# Altium PCB PCB2.PcbDoc
Units mil, origin at the board's own origin, x right, y up, seen from the top; angles counter-clockwise.
Board outline 9040 x 5705 mil, 2 copper layers (Top Layer, Bottom Layer); 65 components, 58 nets, 193 pads, 44 vias.
Unrouted connection lines stored in the file: 10.
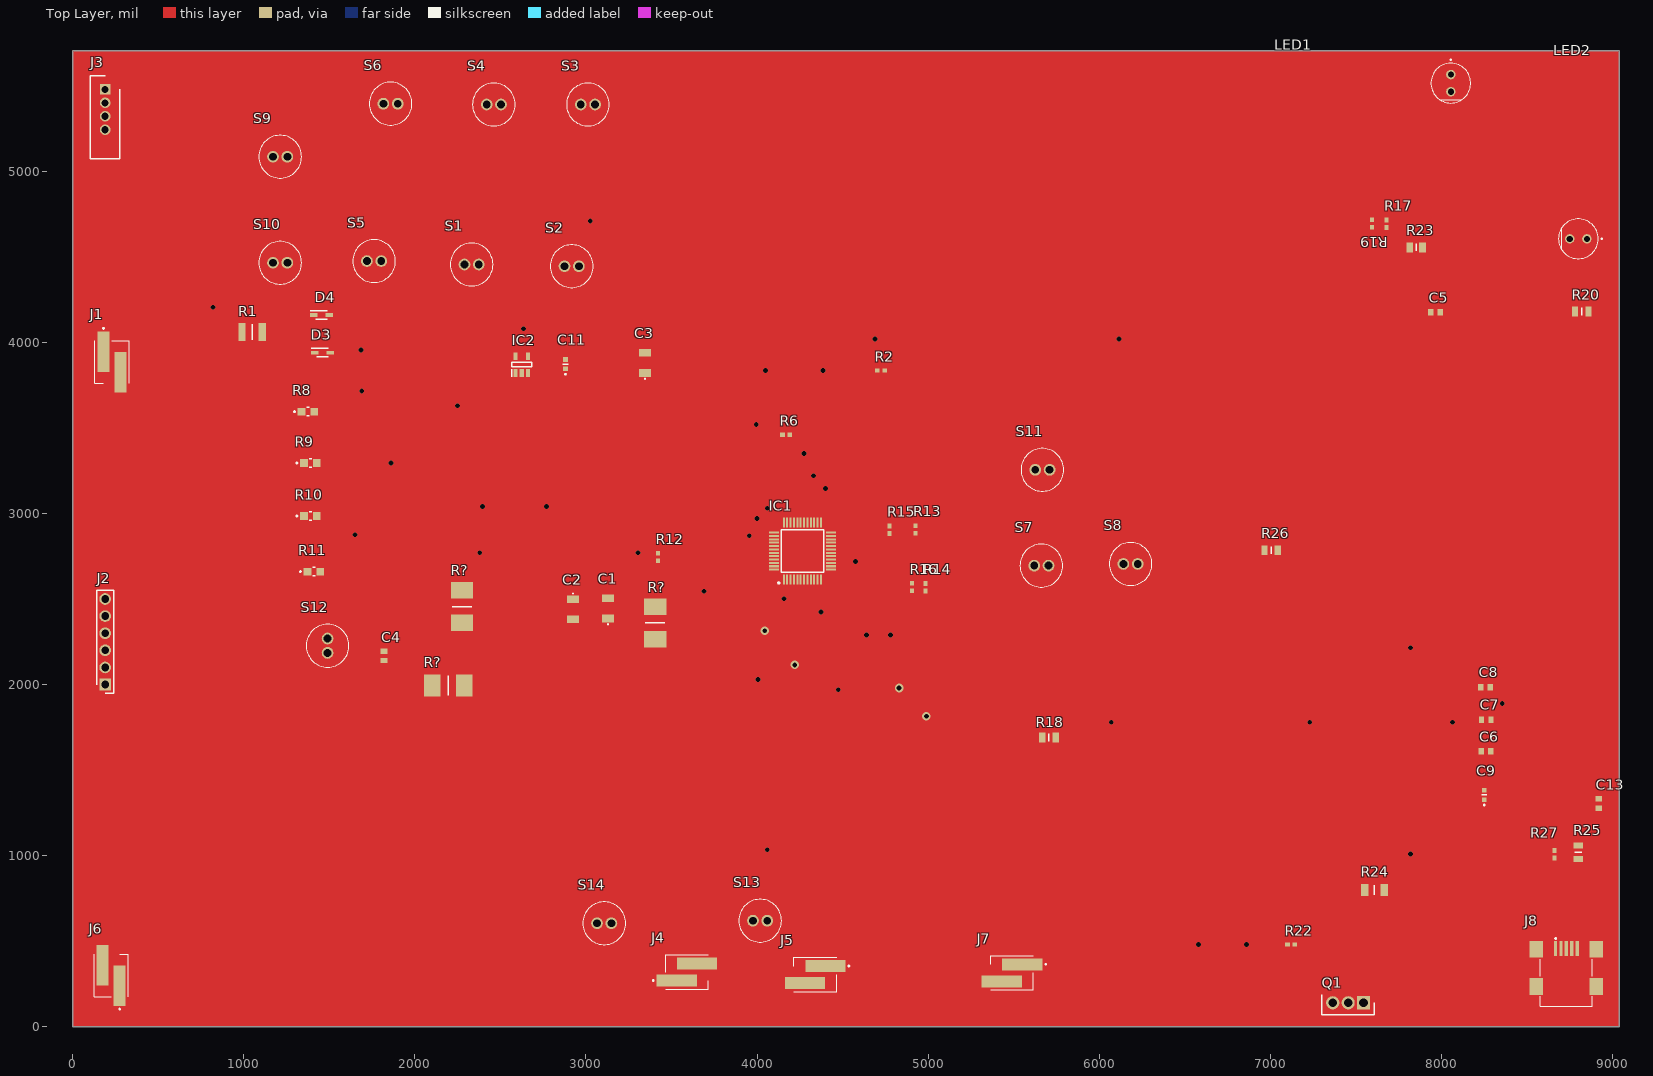
[diagram p0: Top Layer view]
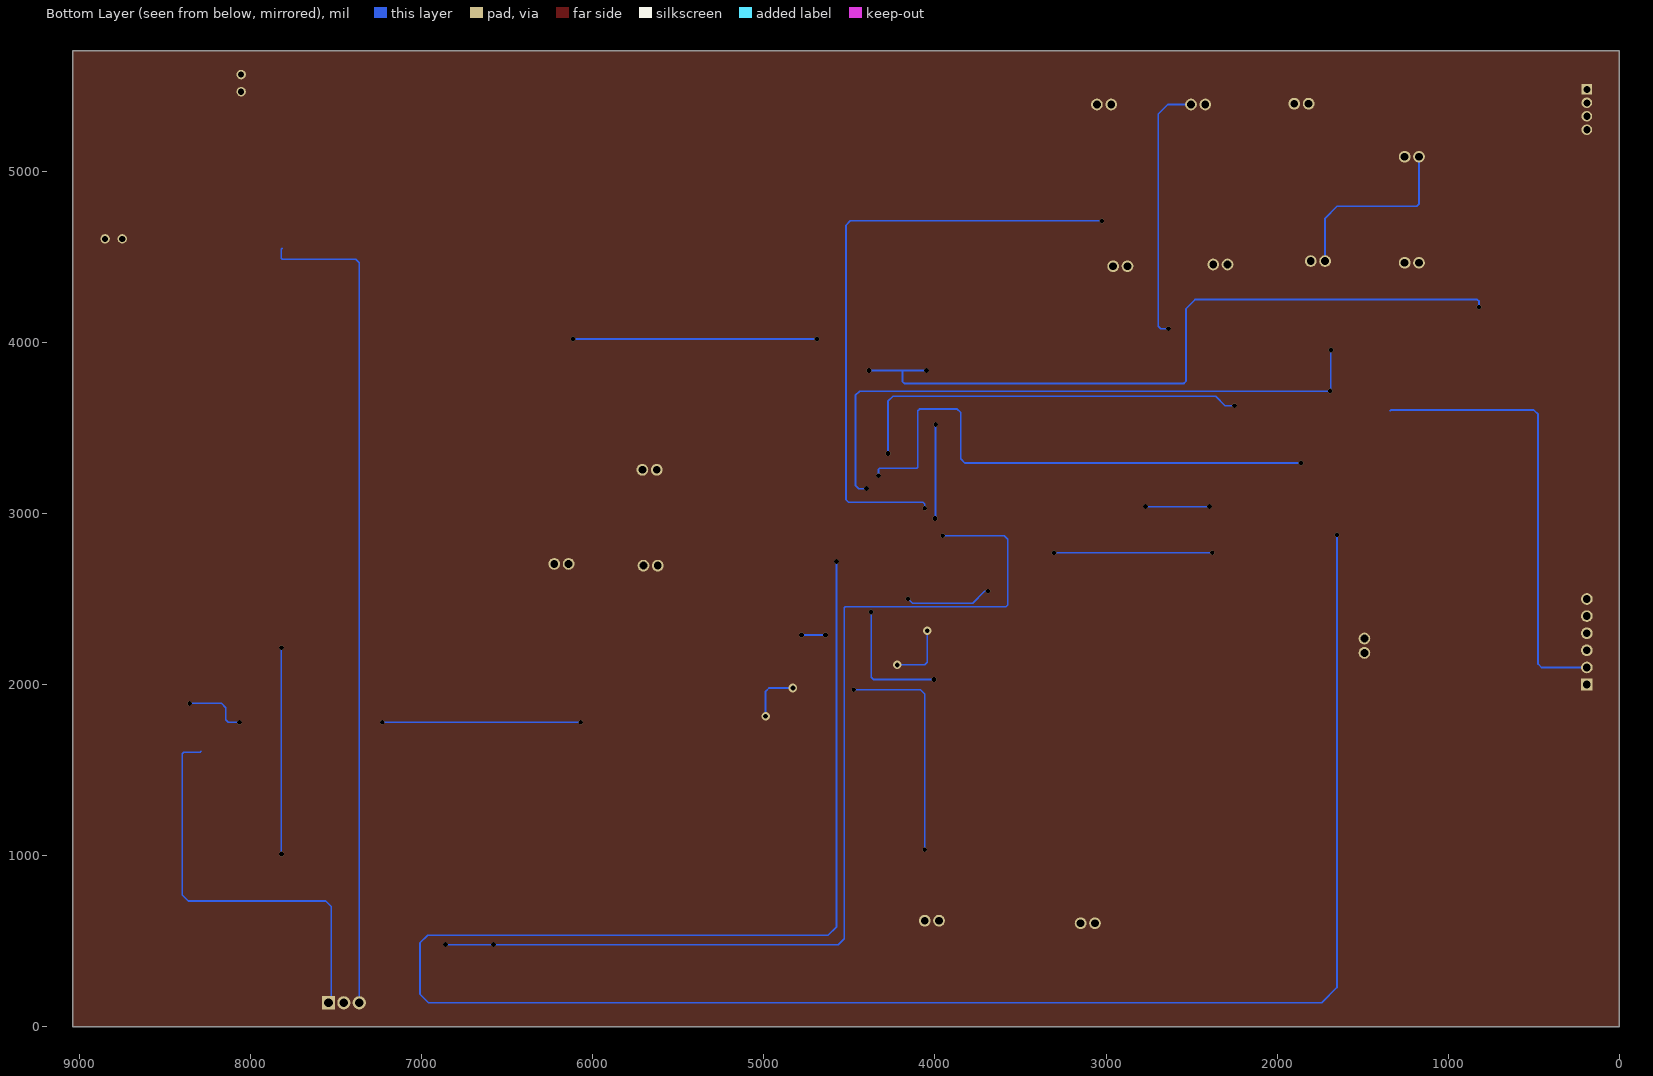
[diagram p1: Bottom Layer view, seen from below]
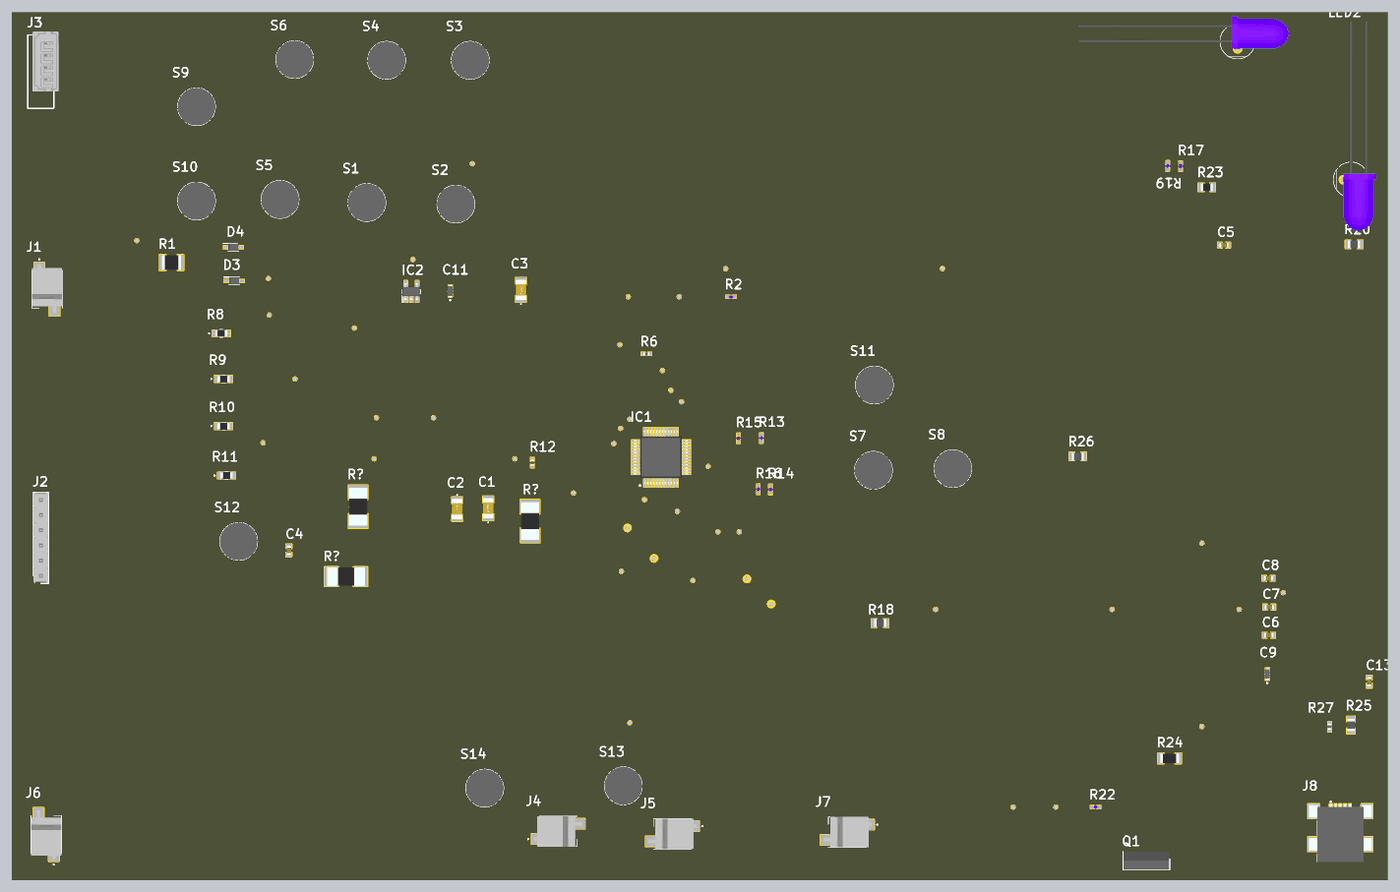
[diagram p2: 3D render of the assembled board from above, using the file's embedded part models]

## Layer stack, top to bottom
Top Solder: solder mask 0.4, Solder Resist, Dk 3.5
Top Layer: signal copper 1.4
Dielectric 1: dielectric 12.6, FR-4, Dk 4.8
Bottom Layer: signal copper 1.4
Bottom Solder: solder mask 0.4, Solder Resist, Dk 3.5

## Board outline
0,0 0,5705 9040,5705 9040,0

## Design rules (kind name [scope] priority, off if disabled: settings)
Clearance [All] p1: gap=10 ignorepadtopadclearanceinfootprint=FALSE
PolygonConnect [All] p1: connectstyle=Relief reliefconductorwidth=10 reliefentries=4 polygonreliefangle="90 Angle" airgapwidth=10
RoutingVias [All] p1: holewidth=28 width=50 viastyle="Through Hole" minholewidth=28 minwidth=50 maxholewidth=28 maxwidth=50
SolderMaskExpansion [All] p1: expansion=4 istentingtop=FALSE
Width [All] p1: maxlimit=10 minlimit=10 preferedwidth=10
30 further rules are at their usual default settings.

## Components (designator, comment, footprint, x,y, rotation, side; value= is the part's Value field where it differs from the comment)
C1 "C1206C200KCGACTU" C1206 3130,2445 r90 top
C2 "C1206C200KCGACTU" C1206 2925,2440 r270 top
C3 "C1206C200KCGACTU" C1206 3345,3880 r90 top
C4 "KAM15AR71H104KM" CAPC1608X90N 1820,2167.56 r90 top
C5 "06035C104K4T4A" CAPC1608X90N 7965,4175 r0 top
C6 "06035C104K4T4A" CAPC1608X90N 8260,1610 r0 top
C7 "06035C104K4T4A" CAPC1608X90N 8262.44,1795 r0 top
C8 "06035C104K4T4A" CAPC1608X90N 8257.56,1985 r0 top
C9 "MAJCT168BB7105KTEA01" MAJx16 8250,1355 r90 top
C11 "MAJCT168BB7105KTEA01" MAJx16 2880,3872.44 r90 top
C13 "06035C104K4T4A" CAPC1608X90N 8920,1305 r90 top
D3 "BAT60JFILM" SOD2513X117N 1460.12,3940 r0 top
D4 "BAT60JFILM" SOD2513X117N 1455,4160 r0 top
IC1 "STM32F103C8T6TR" QFP50P900X900X160-48N 4265,2780 r90 top
IC2 "LD3985M33R" SOT95P280X145-5N 2625,3870 r90 top
J1 "3-647166-2" 36471662 230,3885 r180 top
J2 "22-28-4062" HDRV6W66P0X254_1X6_1524X249X838P 190,2000 r90 top
J3 "53014-0410" SHDR4W60P0X200_1X4_1200X435X1000P 190,5478.74 r90 top
J4 "3-647166-2" 36471662 3590.16,320 r270 top
J5 "3-647166-2" 36471662 4340,305 r90 top
J6 "3-647166-2" 36471662 225,300 r0 top
J7 "3-647166-2" 36471662 5490.16,315 r90 top
J8 "5075BMR-05-SM" 5075BMR05SM 8730,320 r0 top
LED1 "SSL-LX5093VC" SSLLX5093VC 8055,5565 r270 top
LED2 "SSL-LX5093VC" SSLLX5093VC 8850,4605 r180 top
Q1 "BD139" TO229P300X760X1364-3P 7545.16,140 r180 top
R1 "CRCW12102K70FKEAHP" RESC3225X70N 1049.06,4060 r180 top
R2 "MCS04020D4701BE000" RESC1005X37N 4725,3835 r0 top
R6 "SFR01MZPF1003" RESC1005X40N 4170,3460 r0 top
R8 "ERA-6AHD220V" ERA6AEB1020V 1375,3595 r0 top
R9 "ERA-6AHD220V" ERA6AEB1020V 1390,3295 r0 top
R10 "ERA-6AHD220V" ERA6AEB1020V 1390,2985 r0 top
R11 "ERA-6AHD220V" ERA6AEB1020V 1410,2660 r0 top
R12 "SFR01MZPF1003" RESC1005X40N 3420,2745 r270 top
R13 "MCS04020C1000FE000" RESC1005X37N 4925,2906.65 r90 top
R14 "MCS04020D4701BE000" RESC1005X37N 4985,2568.35 r90 top
R15 "MCS04020C1000FE000" RESC1005X37N 4775,2905 r90 top
R16 "MCS04020D4701BE000" RESC1005X37N 4905,2570 r90 top
R17 "MCS04020C1000FE000" RESC1005X37N 7680,4693.35 r270 top
R18 "WSL080500000ZEA9" RESC2013X84N 5705.63,1690 r0 top
R19 "MCS04020C1000FE000" RESC1005X37N 7595,4695 r270 top
R20 "WSL080500000ZEA9" RESC2013X84N 8820,4180 r180 top
R22 "MCS04020C1000FE000" RESC1005X37N 7121.65,480 r180 top
R23 "TNPW080536K0BEEA" RESC2012X55N 7852.4,4555 r0 top
R24 "CRCW12061K50FKEAHP" RESC3116X65N 7607.91,800 r180 top
R25 "WSL080500000ZEA9" RESC2013X84N 8800,1020 r90 top
R26 "WSL080500000ZEA9" RESC2013X84N 7005,2785 r180 top
R27 "SFR01MZPF1003" RESC1005X40N 8660,1008.35 r270 top
R? "CRM2512QJW-103ELF" RESC6331X80N 3405,2360.51 r90 top
R? "CRM2512QJW-103ELF" RESC6331X80N 2275,2455.51 r90 top
R? "CRM2512QJW-103ELF" RESC6331X80N 2195,1995 r0 top
S1 "8631CQD2" 8631CQD2 2290,4455 r0 top
S2 "8631CQD2" 8631CQD2 2875,4445 r0 top
S3 "8631CQD2" 8631CQD2 2970,5390 r0 top
S4 "8631CQD2" 8631CQD2 2420,5390 r0 top
S5 "8631CQD2" 8631CQD2 1720,4475 r0 top
S6 "8631CQD2" 8631CQD2 1816.14,5395 r0 top
S7 "8631CQD2" 8631CQD2 5620,2695 r0 top
S8 "8631CQD2" 8631CQD2 6141.14,2705 r0 top
S9 "8631CQD2" 8631CQD2 1171.14,5085 r0 top
S10 "8631CQD2" 8631CQD2 1255,4465 r180 top
S11 "8631CQD2" 8631CQD2 5626.14,3255 r0 top
S12 "8631CQD2" 8631CQD2 1490,2185 r90 top
S13 "8631CQD2" 8631CQD2 3976.14,620 r0 top
S14 "8631CQD2" 8631CQD2 3065,605 r0 top

## Footprints (in the part's own frame and the unit in brackets; to place one, negate y for a bottom-side part, rotate by r counter-clockwise, add the part's x,y. Pads: shape width x height; smd on the part's side, far side on the other; paste and mask are expansions set on the pad)
5075BMR05SM [mm]
  rect 0.5x2.25 smd: 1(-1.6,3.495) 2(-0.8,3.495) 3(0,3.495) 4(0.8,3.495) 5(1.6,3.495)
  rect 2x2.5 smd: 6(-4.45,3.37) 7(-4.45,-2.13) 8(4.45,-2.13) 9(4.45,3.37)
  silkscreen extent -3.85,-5.07 3.85,5.07, body extent -5.25,-5.07 5.25,4.57, height 4.1
8631CQD2 [mm]
  round 1.74 hole 1.16: 1(0,0) 2(2.13,0)
  silkscreen extent -2.11,-3.17 4.24,3.17, body extent -2.11,-3.17 4.24,3.17, height 14.03
36471662 [mm]
  rect 1.78x5.97 smd: 1(1.27,-1.52) 2(-1.27,1.52)
  silkscreen extent -2.54,-5.1 2.54,3.18, body extent -2.54,-4.08 2.54,4, height 10.55
C1206 [mm]
  rect 1.15x1.8 smd: 1(-1.5,0) 2(1.5,0)
  silkscreen extent -2.4,-0.05 -2.3,0.05, body extent -1.7,-0.9 1.7,0.9, height 1.75
CAPC1608X90N [mm]
  rect 0.78x0.99 smd: 1(-0.7,0) 2(0.7,0)
  body extent -0.8,-0.41 0.8,0.41, height 0.9
ERA6AEB1020V [mm]
  rect 1.15x1.15 smd: 1(-0.95,0) 2(0.95,0)
  silkscreen extent -2.1,-0.63 0.2,0.63, body extent -1,-0.63 1,0.63, height 0.5
HDRV6W66P0X254_1X6_1524X249X838P [mm]
  rect 1.725x1.725 hole 1.15: 1(0,0)
  round 1.725 hole 1.15: 2(2.54,0) 3(5.08,0) 4(7.62,0) 5(10.16,0) 6(12.7,0)
  silkscreen extent -1.27,-1.24 13.97,1.24, body extent -1.27,-1.24 13.97,1.24, height 9.65
MAJx16 [mm]
  rect 0.7x0.7 smd: 1(-0.7,0) 2(0.7,0)
  silkscreen extent -1.6,-0.4 0,0.4, body extent -0.98,-0.4 0.98,0.4, height 0.9
QFP50P900X900X160-48N [mm]
  rect 1.475x0.3 smd: 1(-4.238,2.75) 2(-4.238,2.25) 3(-4.238,1.75) 4(-4.238,1.25) 5(-4.238,0.75) 6(-4.238,0.25) 7(-4.238,-0.25) 8(-4.238,-0.75) 9(-4.238,-1.25) 10(-4.238,-1.75) 11(-4.238,-2.25) 12(-4.238,-2.75) 25(4.238,-2.75) 26(4.238,-2.25) 27(4.238,-1.75) 28(4.238,-1.25) 29(4.238,-0.75) 30(4.238,-0.25) 31(4.238,0.25) 32(4.238,0.75) 33(4.238,1.25) 34(4.238,1.75) 35(4.238,2.25) 36(4.238,2.75)
  rect 0.3x1.475 smd: 13(-2.75,-4.238) 14(-2.25,-4.238) 15(-1.75,-4.238) 16(-1.25,-4.238) 17(-0.75,-4.238) 18(-0.25,-4.238) 19(0.25,-4.238) 20(0.75,-4.238) 21(1.25,-4.238) 22(1.75,-4.238) 23(2.25,-4.238) 24(2.75,-4.238) 37(2.75,4.238) 38(2.25,4.238) 39(1.75,4.238) 40(1.25,4.238) 41(0.75,4.238) 42(0.25,4.238) 43(-0.25,4.238) 44(-0.75,4.238) 45(-1.25,4.238) 46(-1.75,4.238) 47(-2.25,4.238) 48(-2.75,4.238)
  silkscreen extent -4.85,-3.15 3.15,3.62, body extent -4.5,-4.5 4.5,4.5, height 1.6
RESC1005X37N [mm]
  rect 0.7x0.6 smd: 1(-0.55,0) 2(0.55,0)
  body extent -0.5,-0.25 0.5,0.25, height 0.32
RESC1005X40N [mm]
  rect 0.7x0.6 smd: 1(-0.55,0) 2(0.55,0)
  body extent -0.5,-0.25 0.5,0.25, height 0.4
RESC2012X55N [mm]
  rect 1x1.45 smd: 1(-0.95,0) 2(0.95,0)
  silkscreen extent 0,-0.53 0,0.53, body extent -1,-0.63 1,0.63, height 0.55
RESC2013X84N [mm]
  rect 0.95x1.45 smd: 1(-1,0) 2(1,0)
  silkscreen extent 0,-0.54 0,0.54, body extent -1.01,-0.64 1.01,0.64, height 0.36
RESC3116X65N [mm]
  rect 1.1x1.8 smd: 1(-1.45,0) 2(1.45,0)
  silkscreen extent 0,-0.7 0,0.7, body extent -1.55,-0.8 1.55,0.8, height 0.65
RESC3225X70N [mm]
  rect 1.1x2.7 smd: 1(-1.5,0) 2(1.5,0)
  silkscreen extent 0,-1.15 0,1.15, body extent -1.6,-1.25 1.6,1.25, height 0.7
RESC6331X80N [mm]
  rect 2.45x3.3 smd: 1(-2.4,0) 2(2.4,0)
  silkscreen extent 0,-1.45 0,1.45, body extent -3.15,-1.55 3.15,1.55, height 0.8
SHDR4W60P0X200_1X4_1200X435X1000P [mm]
  rect 1.575x1.575 hole 1.05: 1(0,0)
  round 1.575 hole 1.05: 2(-2,0) 3(-4,0) 4(-6,0)
  silkscreen extent -10.3,-2.17 2,2.17, body extent -7.45,-2.96 2.55,1.39, height 5.85
SOD2513X117N [mm]
  rect 1.085x0.55 smd: 1(-1.14,0) 2(1.14,0)
  silkscreen extent -1.68,-0.64 0.83,0.64, body extent -1.25,-0.64 1.25,0.64, height 1.17
SOT95P280X145-5N [mm]
  rect 1.15x0.6 smd: 1(-1.25,0.95) 2(-1.25,0) 3(-1.25,-0.95) 4(1.25,-0.95) 5(1.25,0.95)
  silkscreen extent -1.83,-1.48 0.33,1.5, body extent -1.4,-1.48 1.4,1.48, height 1.45
SSLLX5093VC [mm]
  round 1.4 hole 0.91: 1(0,0) 2(2.54,0)
  silkscreen extent -2.3,-2.95 4.22,2.95, body extent -2.93,-26.5 2.51,8.6, height 2.95
TO229P300X760X1364-3P [mm]
  rect 1.95x1.95 hole 1.3: 1(0,0)
  round 1.95 hole 1.3: 2(2.29,0) 3(4.58,0)
  silkscreen extent -1.61,-1.19 6.19,1.81, body extent -1.51,-1.19 6.09,1.81, height 12.76

## Part data
C1 C2 C3: "Capacitor", Manufacturer_Name=KEMET, Datasheet Link=https://content.kemet.com/datasheets/KEM_C1009_C0G_HV_SMD.pdf, Manufacturer_Part_Number=C1206C200KCGACTU
C4: "Capacitor", Manufacturer_Name="Kyocera AVX", Mouser Part Number=581-KAM15AR71H104KM, Arrow Part Number=KAM15AR71H104KM, Arrow Price/Stock=https://www.arrow.com/en/products/kam15ar71h104km/avx?region=nac, Datasheet Link=https://datasheets.kyocera-avx.com/AutoMLCCKAM.pdf, Height=0.9mm, Manufacturer_Part_Number=KAM15AR71H104KM, Mouser Price/Stock=https://www.mouser.co.uk/ProductDetail/KYOCERA-AVX/KAM15AR71H104KM?qs=Jm2GQyTW%2FbgzS5FHJWrFzQ%3D%3D
C5 C6 C7 C8 C13: "Capacitor", Manufacturer_Name="Kyocera AVX", Mouser Part Number=581-06035C104K4T4A, Arrow Part Number=06035C104K4T4A, Arrow Price/Stock=https://www.arrow.com/en/products/06035c104k4t4a/avx, Datasheet Link=https://componentsearchengine.com/Datasheets/1/06031A100FAT2A.pdf, Height=0.9mm, Manufacturer_Part_Number=06035C104K4T4A, Mouser Price/Stock=https://www.mouser.co.uk/ProductDetail/KYOCERA-AVX/06035C104K4T4A?qs=NBj5Hwer2CEXBYKT%252BbuSBA%3D%3D
C9 C11: "Capacitor", Manufacturer_Name="TAIYO YUDEN", Datasheet Link=https://ds.yuden.co.jp/TYCOMPAS/or/detail?pn=MAJCT168BB7105KTEA01, Height=0.8mm, Manufacturer_Part_Number=MAJCT168BB7105KTEA01
D3 D4: "Schottky Diode", Manufacturer_Name=STMicroelectronics, Mouser Part Number=511-BAT60JFILM, Arrow Part Number=BAT60JFILM, Arrow Price/Stock=https://www.arrow.com/en/products/bat60jfilm/stmicroelectronics?region=nac, Datasheet Link=https://www.mouser.jp/datasheet/2/389/cd00001944-1795661.pdf, Height=1.17mm, Manufacturer_Part_Number=BAT60JFILM, Mouser Price/Stock=https://www.mouser.co.uk/ProductDetail/STMicroelectronics/BAT60JFILM?qs=GnFZssByvVVVnMaukcyLZg%3D%3D
IC1: "Integrated Circuit", Manufacturer_Name=STMicroelectronics, Mouser Part Number=511-STM32F103C8T6TR, Arrow Part Number=STM32F103C8T6TR, Arrow Price/Stock=https://www.arrow.com/en/products/stm32f103c8t6tr/stmicroelectronics?region=nac, Datasheet Link=http://media.digikey.com/pdf/Data%20Sheets/ST%20Microelectronics%20PDFS/STM32F103x8,B.pdf, Height=1.6mm, Manufacturer_Part_Number=STM32F103C8T6TR, Mouser Price/Stock=https://www.mouser.co.uk/ProductDetail/STMicroelectronics/STM32F103C8T6TR?qs=5HwTSiuA5HDxFj62n06yag%3D%3D
IC2: "Integrated Circuit", Manufacturer_Name=STMicroelectronics, Mouser Part Number=511-LD3985M33R, Arrow Part Number=LD3985M33R, Arrow Price/Stock=https://www.arrow.com/en/products/ld3985m33r/stmicroelectronics?region=europe, Datasheet Link=http://www.st.com/st-web-ui/static/active/en/resource/technical/document/datasheet/CD00003395.pdf, Height=1.45mm, Manufacturer_Part_Number=LD3985M33R, Mouser Price/Stock=https://www.mouser.co.uk/ProductDetail/STMicroelectronics/LD3985M33R?qs=22WmWNTp1rrPOccVv4HZ7A%3D%3D
J1 J4 J5 J6 J7: "Connector", Manufacturer_Name="TE Connectivity", Mouser Part Number=571-3-647166-2, Arrow Part Number=3-647166-2, Arrow Price/Stock=https://www.arrow.com/en/products/3-647166-2/te-connectivity?region=nac, Datasheet Link=https://www.te.com/commerce/DocumentDelivery/DDEController?Action=showdoc&DocId=Customer+Drawing%7F647166%7FR1%7Fpdf%7FEnglish%7FENG_CD_647166_R1.pdf%7F3-647166-2, Height=10.66mm, Manufacturer_Part_Number=3-647166-2, Mouser Price/Stock=https://www.mouser.co.uk/ProductDetail/TE-Connectivity/3-647166-2?qs=xsTFCgGnzbJU1qz6Np9kzA%3D%3D
J2: "Connector", Manufacturer_Name=Molex, Mouser Part Number=538-22-28-4062, Datasheet Link=https://datasheet.datasheetarchive.com/originals/distributors/SFDatasheet-1/sf-00031037.pdf, Height=8.38mm, Manufacturer_Part_Number=22-28-4062, Mouser Price/Stock=https://www.mouser.com/Search/Refine.aspx?Keyword=538-22-28-4062
J3: "Connector", Manufacturer_Name=Molex, Mouser Part Number=538-53014-0410, Datasheet Link=https://www.molex.com/pdm_docs/sd/530140410_sd.pdf, Height=10mm, Manufacturer_Part_Number=53014-0410, Mouser Price/Stock=https://www.mouser.co.uk/ProductDetail/Molex/53014-0410?qs=TLs3Kb%252BkMqKk8s1WRHwRGw%3D%3D
J8: "Connector", Manufacturer_Name=NELTRON, Datasheet Link=http://www.ibselectronics.com/ibsstore/datasheet/5075BMR-05-SM-CR.pdf, Height=4mm, Manufacturer_Part_Number=5075BMR-05-SM
LED1 LED2: "LED", Manufacturer_Name=Lumex, Mouser Part Number=696-SSL-LX5093VC, Arrow Part Number=SSL-LX5093VC, Arrow Price/Stock=https://www.arrow.com/en/products/ssl-lx5093vc/lumex?region=nac, Datasheet Link=https://componentsearchengine.com/Datasheets/2/SSL-LX5093VC.pdf, Height=9.6mm, Manufacturer_Part_Number=SSL-LX5093VC, Mouser Price/Stock=https://www.mouser.co.uk/ProductDetail/Lumex/SSL-LX5093VC?qs=94qWIstW55UoxYgVqNRcug%3D%3D
Q1: "Transistor BJT NPN", Manufacturer_Name=onsemi, Mouser Part Number=863-BD139, Datasheet Link=http://www.onsemi.com/pub/Collateral/BD135-D.PDF, Height=3mm, Manufacturer_Part_Number=BD139, Mouser Price/Stock=https://www.mouser.co.uk/ProductDetail/onsemi/BD139?qs=vNc2DXHODiI0%252BZZC8g2wVg%3D%3D
R1: "Resistor", Manufacturer_Name=Vishay, Mouser Part Number=71-CRCW12102K70FKEAH, Datasheet Link=http://componentsearchengine.com/Datasheets/1/CRCW12102K70FKEAHP.pdf, Height=0.7mm, Manufacturer_Part_Number=CRCW12102K70FKEAHP, Mouser Price/Stock=https://www.mouser.co.uk/ProductDetail/Vishay-Dale/CRCW12102K70FKEAHP?qs=OAzHGkhREL0m0%252BU1n6AaAg%3D%3D
R2 R14 R16: "Resistor", Manufacturer_Name=Vishay, Mouser Part Number=594-MCS04020D4701BE0, Datasheet Link=http://www.vishay.com/docs/28705/mcx0x0xpro.pdf, Height=0.37mm, Manufacturer_Part_Number=MCS04020D4701BE000, Mouser Price/Stock=https://www.mouser.co.uk/ProductDetail/Vishay-Beyschlag/MCS04020D4701BE000?qs=ft9OtscSA3%252BR0DpF5QqL2Q%3D%3D
R6 R12 R27: "Resistor", Manufacturer_Name="ROHM Semiconductor", Mouser Part Number=755-SFR01MZPF1003, Datasheet Link=https://fscdn.rohm.com/en/products/databook/datasheet/passive/resistor/chip_resistor/sfr-e.pdf, Height=0.4mm, Manufacturer_Part_Number=SFR01MZPF1003, Mouser Price/Stock=https://www.mouser.co.uk/ProductDetail/ROHM-Semiconductor/SFR01MZPF1003?qs=Mv7BduZupUj2RFL5gMaKTg%3D%3D
R8 R9 R10 R11: "Resistor", Manufacturer_Name=Panasonic, Mouser Part Number=667-ERA-6AHD220V, Datasheet Link=https://industrial.panasonic.com/cdbs/www-data/pdf/RDM0000/AOA0000C307.pdf, Height=0.6mm, Manufacturer_Part_Number=ERA-6AHD220V, Mouser Price/Stock=https://www.mouser.co.uk/ProductDetail/Panasonic/ERA-6AHD220V/?qs=MNPzkKEzRtQTWqg2JSKn2A%3D%3D
R13 R15 R17 R19 R22: "Resistor", Manufacturer_Name=Vishay, Mouser Part Number=594-MCS04020C1000FE0, Arrow Part Number=MCS04020C1000FE000, Arrow Price/Stock=https://www.arrow.com/en/products/mcs04020c1000fe000/vishay, Datasheet Link=http://www.vishay.com/docs/28705/mcx0x0xpro.pdf, Height=0.37mm, Manufacturer_Part_Number=MCS04020C1000FE000, Mouser Price/Stock=https://www.mouser.co.uk/ProductDetail/Vishay-Beyschlag/MCS04020C1000FE000?qs=7ZE6F4QMOBYkwvQlfbkT8w%3D%3D
R18 R20 R25 R26: "Resistor", Manufacturer_Name=Vishay, Mouser Part Number=71-WSL080500000ZEA9, Arrow Part Number=WSL080500000ZEA9, Arrow Price/Stock=https://www.arrow.com/en/products/wsl080500000zea9/vishay?region=nac, Datasheet Link=https://ad.componentsearchengine.com/Datasheets/2/WSL080500000ZEA9.pdf, Height=0.838mm, Manufacturer_Part_Number=WSL080500000ZEA9, Mouser Price/Stock=https://www.mouser.co.uk/ProductDetail/Vishay-Dale/WSL080500000ZEA9?qs=f1l5vAGoKgsImKS87N8TmQ%3D%3D
R23: "Resistor", Manufacturer_Name=Vishay, Datasheet Link=https://www.vishay.com/docs/31006/tnpw.pdf, Height=0.55mm, Manufacturer_Part_Number=TNPW080536K0BEEA
R24: "Resistor", Manufacturer_Name=Vishay, Mouser Part Number=71-CRCW12061K50FKEAH, Arrow Part Number=CRCW12061K50FKEAHP, Arrow Price/Stock=https://www.arrow.com/en/products/crcw12061k50fkeahp/vishay?region=nac, Datasheet Link=http://componentsearchengine.com/Datasheets/1/CRCW12061K50FKEAHP.pdf, Height=0.65mm, Manufacturer_Part_Number=CRCW12061K50FKEAHP, Mouser Price/Stock=https://www.mouser.co.uk/ProductDetail/Vishay-Dale/CRCW12061K50FKEAHP?qs=k2%2FDWSARqgEwHXAQbL4aEg%3D%3D
R? R? R?: "Resistor", Manufacturer_Name=Bourns, Mouser Part Number=652-CRM2512QJW-103E, Arrow Part Number=CRM2512QJW-103ELF, Arrow Price/Stock=https://www.arrow.com/en/products/crm2512qjw-103elf/bourns?region=nac, Datasheet Link=http://www.bourns.com/data/global/pdfs/CRM0805_1206_2010.pdf, Height=0.8mm, Manufacturer_Part_Number=CRM2512QJW-103ELF, Mouser Price/Stock=https://www.mouser.co.uk/ProductDetail/Bourns/CRM2512QJW-103ELF?qs=8Wlm6%252BaMh8Rzg3bRHdWGsA%3D%3D
S1 S2 S3 S4 S5 S6 S7 S8 S9 S10 S11 S12 S13 S14: "Switch (2-Pin Push)", Manufacturer_Name="C & K COMPONENTS", Mouser Part Number=611-8631-261, Datasheet Link=https://www.ckswitches.com/media/1396/8600.pdf, Height=13.93mm, Manufacturer_Part_Number=8631CQD2, Mouser Price/Stock=https://www.mouser.co.uk/ProductDetail/CK/8631CQD2?qs=ktcBc77oICXe9iPhfEwnkA%3D%3D

## Via types
v1: diameter 28, hole 28, Top Layer to Bottom Layer, 40 vias
v2: diameter 50, hole 28, Top Layer to Bottom Layer, 4 vias

## Nets (pads, with @x,y where several pads share a name; then routed paths per layer and width w, separated by ;. In a path a pad name is that pad's centre, name@x,y a point inside that pad or via, vN(x,y) a via of type N, cw(c..) or ccw(c..) an arc to the next point about the centre after c; other vN are vias at no path point)
+3V3: R14.1
+3V3_ST_LINK: C5.2 C6.2 C7.2 C8.2 IC1.1 IC1.9 IC1.24 IC1.36 IC1.48 IC2.5 J1.2 Q1.1 R12.2 R18.2 R20.2 S4.2 | length 19201.2
  Top Layer w10: J1.2 2330.16,3825.16 2332.54,3827.54 ; v1(2395,3040) 2350,3040 2332.54,3057.46 2332.54,3827.54 ; IC2.5@2580.79,3926.02 IC2.5 2587.6,4074.14 2593.46,4080 v1(2635,4080) ; 2585,3975 2355,3975 2332.54,3952.54 2332.54,3827.54 ; v1(2770,3040) 3170,3040 3205,3005 3205,2713.28 3248.28,2670 3420,2670 ; R12.2 3420,2670 ; IC1.48 4046.73,2671.73 4045,2670 3420,2670 ; IC1.48@4125,2670 4140,2670 4156.73,2686.73 IC1.36 ; v2(4220,2115) 4315,2115 ; IC1.9 4314.21,2555.79 4315,2555 4315,2115 ; R18.2 5920,1690 5940,1710 5940,1780 ; v1(6070,1780) 5940,1780 ; v1(7230,1780) v1(8065,1780) ; C5.2 7997.56,4180 8389.09,4180 ; C6.2 C7.2@8287.56,1792.56 ; v1(8355,1890) 8405,1890 8430,1865 8430,1820 8405,1795 C7.2 8285.12,1799.88 C8.2 8360,1985 8385,2010 8385,4175.91 8389.09,4180 ; R20.2 8389.09,4180 ; 4315,2115 4315,1940 4335,1920 5915,1920 5940,1895 5940,1780
  Bottom Layer w10: v1(2395,3040) v1(2770,3040) ; S4.2 2640,5390 2695,5335 2695,4095 2680,4080 v1(2635,4080) ; v2(4045,2315) 4045,2130 4060,2115 v2(4220,2115) ; v1(6070,1780) v1(7230,1780) ; Q1.1 7528.24,156.92 7528.24,703.24 7560,735 8365,735 8400,770 8400,1595 8390,1605 8295,1605 8290,1610 ; v1(8065,1780) 8130,1780 8145,1795 8145,1865 8170,1890 v1(8355,1890)
"AIN 1": 
E5V: D3.2 D4.2 R1.1 | length 858.6
  Top Layer w10: R1.1 1585,4060 1590,4055 ; D4.2 1570,4160 1590,4140 1590,4055 ; D3.2 1575,3940 1590,3955 1590,4055
GND: C1.2 C2.2 C3.2 C4.1 C5.1 C6.1 C7.1 C8.1 C9.1 C9.2 C11.1 C13.1 C13.2 D3.1 D4.1 IC1.8 IC1.20 IC1.23 IC1.32 IC1.35 IC1.47 IC2.1 IC2.2 IC2.3 J2.3 J5.2 J6.1 J6.2 J7.1 J7.2 J8.5 J8.6 J8.7 J8.8 J8.9 LED1.2 R2.2 R6.2 R16.1 R23.2 R25.2 R?.1@2275,2361.02 R?.1@3405,2266.02 R?.2@2289.49,1995 S8.2 S12.1 | length 619.7
  Top Layer w10: J6.2 175,340.16 J6.2@205.04,310.12 ; J2.3@184.4,2198.1 J2.3@190,2192.5 ; J6.1@244.96,310.12 275,280.08 J6.1 ; S12.1@1482.5,2192.5 S12.1 ; R?.1@2275,2361.02 R?.1@2289.49,2346.54 ; IC2.3 2662.4,3811.81 IC2.3@2669.21,3805 ; C2.2@2920.08,2376.02 C2.2 ; C3.2 C3.2@3355,3949.06 ; R?.1@3390,2251.02 R?.1@3405,2266.02 ; J7.2@5420.31,275 J7.2 5489.92,265 J7.2@5519.96,295.04 ; J7.1@5519.96,334.96 J7.1 ; LED1.2@8055,5452.79 LED1.2 ; C8.1 C8.1@8234.88,1980.12 ; C7.1@8232.44,1792.56 C7.1 ; J8.6@8554.8,442.83 J8.6 ; J8.5 8792.99,457.52 J8.5@8797.83,452.68 ; 8800,1014.33 R25.2 ; J8.9@8870.83,408.46 8894.7,432.34 J8.9@8894.7,442.18 ; J8.8@8900,240 8903.86,236.14 J8.8 ; J8.9@8900,447.48 J8.9 ; C13.1@8905.2,1266.77 8915.87,1277.44 C13.1 C13.2
LED_STLINK: IC1.30
MCO: S11.2
NetC3_1: C3.1 R13.2 S11.1 | length 4227.3
  Top Layer w10: C3.1 3345,3745 3355,3735 3969.14,3735 3975,3740.86 3975,3835 4010,3870 4240,3870 4270,3900 4270,4040 4290,4060 4980,4060 4990,4050 4990,2930 ; R13.2 4925,2979.14 4930.86,2985 4945,2985 4947.15,2982.85 4949.14,2982.85 4955,2976.99 4955,2950 4975,2930 4990,2930 ; S11.1 5230,3255 5220,3245 5220,2940 5210,2930 4990,2930
NetC11_2: C11.2 IC2.4 | length 356.1
  Top Layer w10: IC2.4 2662.4,3972.4 2678.36,3988.36 2863.59,3988.36 2880,3971.94 C11.2
NetD1_1: J2.1 R?.1@2100.51,1995 | length 1913.8
  Top Layer w10: J2.1@187.64,1997.36 190,1995 R?.1@2100.51,1995
NetD1_2: 
NetIC1_2: IC1.2 R?.2@3405,2455 | length 1028.5
  Top Layer w9.96: v1@4157.42,2506.31 4176.42,2525.3 IC1.2
  Top Layer w10: R?.2@3395,2465.51 R?.2@3395,2495.51 ; R?.2@3405,2455 3405,2539.14 3410.86,2545 v1(3690,2545) ; v1(4157.42,2501.44) v1@4157.42,2506.31
  Bottom Layer w10: v1(3690,2545) 3690.51,2544.49 3710.51,2544.49 3780,2475 4130.98,2475 v1(4157.42,2501.44)
NetIC1_3: IC1.3 R?.2@2275,2550 | length 2762.8
  Top Layer w10: R?.2@2275,2550 2275,2625 2310,2660 2875,2660 2920,2615 3895,2615 3925,2585 3925,2250 3950,2225 4175,2225 4195,2245 4195,2555 4196.1,2556.1 IC1.3
NetIC1_10: IC1.10 R14.2 R16.2 | length 770.5
  Top Layer w10: v1(4780,2290) 4814.14,2290 4820,2295.86 4820,2629.14 4825.86,2635 4910.86,2635 ; R16.2 4905,2629.14 4910.86,2635 ; R14.2 4985,2629.14 4979.14,2635 4910.86,2635
  Bottom Layer w10: v1(4640,2290) v1(4780,2290)
NetIC1_21: IC1.21 J5.1 R18.1 | length 4236.3
  Top Layer w10: J5.1 4399.84,1654.84 4435,1690 4985,1690 ; IC1.21 4590.79,2829.21 4615,2805 4615,2705.86 4620.86,2700 4715,2700 4725,2690 4725,1995 4740,1980 v2(4830,1980) ; v2(4990,1815) 4985,1810 4985,1690 ; R18.1 4985,1690
  Bottom Layer w10: v2(4830,1980) 4970,1980 4990,1960 v2(4990,1815)
NetIC1_28: IC1.28
NetIC1_29: IC1.29 R13.1 | length 1577.5
  Top Layer w10: IC1.29 4294.53,3051.73 4295,3052.21 4295,3300 4310,3315 4825,3315 4880,3260 4880,2790 4890.86,2779.14 4899.14,2779.14 4925,2805 R13.1
NetIC1_39: IC1.39 J1.1 R1.2 R2.1 | length 6937.1
  Top Layer w10: J1.1@180,3959.92 185.08,3965 185.08,4032.4 210.04,4057.36 820,4057.36 ; v1(820,4205) 820,4057.36 ; R1.2@990,4057.36 820,4057.36 ; v1(3995,3520) 3995,3820 4010,3835 v1(4050,3835) ; v1(4000,2970) 4000,2930 3990,2920 3910,2920 3900,2910 3900,2855 3914,2841 3990.2,2841 3997.79,2848.58 IC1.39@4098.15,2848.58 ; v1(4385,3835) R2.1@4695,3835
  Bottom Layer w10: v1(820,4205) 820,4240 830,4250 2480,4250 2533,4197 2533,3772 2545,3760 4180,3760 4190,3770 4190,3835 ; v1(3995,3520) 3997.5,3517.5 3997.5,2972.5 v1(4000,2970) ; v1(4050,3835) 4190,3835 ; v1(4385,3835) 4225,3835 4224.14,3835.86 4215.86,3835.86 4215,3835 4190,3835
NetIC1_43: IC1.43 R6.1 | length 1161.3
  Top Layer w10: IC1.43@4098.15,2770 3900,2770 3880,2790 3880,3454.14 3885.86,3460 R6.1
NetJ2_2: J2.2 R8.1 | length 2640.7
  Bottom Layer w10: J2.2@180,2100 J2.2 455,2100 475,2120 475,3580 500,3605 1335,3605 1340,3600
NetJ2_4: J2.4 R9.1 | length 2309.2
  Top Layer w10: 135,2300 95,2300 75,2320 75,3275 95,3295 R9.1
NetJ2_5: J2.5 R10.1 | length 1905.4
  Top Layer w10: J2.5 120,2400 100,2420 100,2960 130,2990 1347.6,2990 R10.1
NetJ2_6: J2.6 R11.1 | length 1317.2
  Top Layer w10: J2.6 1250,2500 1251.72,2500 1273.77,2522.05 1273.77,2638.77 1295,2660 R11.1
NetJ3_1: J3.1 S3.2 S4.1 | length 3836
  Top Layer w10: J3.1 1463.74,5478.74 1490,5505 1490,5570 1515,5595 2240,5595 ; S4.1 2415,5385 2255,5385 2240,5400 2240,5595 ; S3.2 3195,5390 3210,5405 3210,5585 3200,5595 2240,5595
NetJ3_2: J3.2 S5.2 S6.1 | length 2733.4
  Top Layer w10: J3.2 192.5,5397.5 1575,5397.5 ; S5.2 1810,4481.14 1810,4785 1730,4865 1610,4865 1575,4900 1575,5397.5 ; S6.1@1825,5386.14 S6.1 1813.64,5397.5 1575,5397.5
NetJ3_3: J3.3 S7.2 S8.1 | length 9638.9
  Top Layer w10: J3.3 188.74,5320 65,5320 50,5335 50,5605 70,5625 5885,5625 5915,5595 5915,2700 ; S7.2 5708.86,2700 5915,2700 ; S8.1 6136.14,2700 5915,2700
NetJ3_4: J3.4 S9.2 S10.1 | length 1832.3
  Top Layer w10: J3.4 1237.48,5242.52 1250,5230 1250,5090 S9.2 S10.1
NetJ8_2: J8.2 R27.2 | length 543.4
  Top Layer w10: R27.2@8660,985 8660,820 8698.5,781.5 J8.2
NetJ8_3: J8.3 R24.1 R26.1 | length 4683.6
  Top Layer w10: R26.1 7795,2785 7820,2760 v1(7820,2215) ; R24.1 7820,800 ; v1(7820,1010) 7820,800 ; J8.3 8730,1060 8700,1090 8625,1090 8590,1055 8590,820 8570,800 7820,800
  Bottom Layer w10: v1(7820,1010) v1(7820,2215)
NetJ8_4: J8.4 R25.1 | length 543.6
  Top Layer w10: 7010.71,1124.85 7010.86,1125 ; J8.4 8761.5,776.5 8800,815 R25.1 R25.1@8800,985
NetLED1_1: LED1.1 R17.2 | length 1407.8
  Top Layer w10: R17.2 7680,4605 7695,4590 7720,4590 7740,4610 7740,5559.14 7745.86,5565 LED1.1
NetLED2_1: LED2.1 R20.1 | length 428.9
  Top Layer w10: LED2.1 8850,4189.37 R20.1
NetLED2_2: LED2.2 R19.2 | length 1504.1
  Top Layer w10: R19.2 7595,4480 7625,4450 8730,4450 8750,4470 LED2.2
NetQ1_2: Q1.2 R24.2 | length 735.3
  Top Layer w10: Q1.2 7455,765 7490,800 R24.2
NetQ1_3: Q1.3 R22.1 R23.1 | length 5403.5
  Top Layer w10: R22.1@7145,480 7335,480 7365,450 7365,140.16 Q1.3 ; R23.1 R23.1@7820,4555
  Bottom Layer w10: Q1.3 7364.84,145.16 7360,150 7364.84,154.84 7364.84,4464.84 7385,4485 7814.14,4485 7820,4490.86 7820,4545 7815,4550
NetR17_1: R17.1 R19.1 | length 85.7
  Top Layer w10: R19.1 7595.83,4715.83 7679.17,4715.83 R17.1
NetS1_2: S1.2 S2.2 S5.1 S9.1 | length 2617.5
  Top Layer w10: S5.1 1730,4465 1730,4375.86 1735.86,4370 1740,4370 1745,4365 2379.14,4365 ; S1.2 2385.05,4443.81 2385.05,4370.91 2379.14,4365 ; S2.2 2958.86,4379.72 2944.14,4365 2379.14,4365
  Bottom Layer w10: S9.1 1171.14,4811.14 1169.14,4809.14 1183.28,4795 1650,4795 1720,4725 S5.1
NetS13_1: S13.1
NetS14_1: S14.1
"OSC IN": C2.1 IC1.5 | length 2138.2
  Top Layer w10: C2.1 2925,2570 2945,2590 3880,2590 3900,2570 3900,2220 3920,2200 4205,2200 4235,2230 IC1.5@4235,2600
"OSC OUT": C1.1 IC1.6 | length 1732.1
  Top Layer w10: C1.1 3130,2200 3150,2180 4220,2180 4255.16,2215.16 4255.16,2506.56 4255,2506.72 4255,2573.28 4255.16,2573.44 IC1.6
STLINK_RX: IC1.13 J4.2 S13.2 | length 3537
  Top Layer w10: J4.2@3679.14,370 4054.14,370 4060,375.86 S13.2 v1(4060,1035) ; IC1.13 4678.27,2671.73 4690,2660 4690,1985 4675,1970 v1(4475,1970)
  Bottom Layer w10: v1(4060,1035) 4060,1945 4085,1970 v1(4475,1970)
STLINK_TX: IC1.12 J4.1 S14.2 | length 3828.7
  Top Layer w10: J4.1@3506.92,265 3178.36,265 3148.86,294.5 S14.2 3148.86,1008.86 3205,1065 3855,1065 3915,1125 3915,2015 3930,2030 v1(4005,2030) ; v1(4373.27,2424) IC1.12
  Bottom Layer w10: v1(4005,2030) 4360,2030 4373.27,2043.27 v1(4373.27,2424)
"STM RST": C4.2 IC1.7 R12.1 S12.2 | length 5749.5
  Top Layer w9.96: 1880,2640 1880,2195 1915,2160 4230,2160 4274.84,2204.84 IC1.7
  Top Layer w10: S12.2 1820,2268.86 ; C4.2 1820,2268.86 ; v1(2380,2770) 2030,2770 2010,2750 2010,2670 1980,2640 1880,2640 1840,2640 1820,2620 1820,2268.86 ; v1(3305,2770) 3413.19,2770 3420,2763.19 R12.1@3420,2761.65
  Bottom Layer w10: v1(2380,2770) v1(3305,2770)
STM_JTCK: IC1.37 S6.2 | length 5587.2
  Top Layer w10: S6.2 2200,5395 2230,5365 2230,4745 2265,4710 v1(3025,4710) ; v1(4060,3030) 4060,2975 4025,2940 4025,2905 4041.73,2888.27 IC1.37
  Bottom Layer w10: v1(3025,4710) 4495,4710 4520,4685 4520,3080 4505,3065 4070,3065 4060,3055 v1@4060,3040
STM_JTCS: IC1.34
STM_JTMS: S10.2
"T JTCK": IC1.15 IC1.26 R8.2 S3.1 | length 7676.8
  Top Layer w10: R8.2@1415,3600 1412.4,3597.4 R8.2 1665,3595 1690,3620 v1(1690,3715) ; v1(1685,3955) 1685,4145 1720,4180 3135,4180 3150,4195 3150,4770 3130,4790 2785,4790 2760,4815 2760,5350 2792.67,5382.67 2962.67,5382.67 S3.1 ; IC1.26 4353.58,3139.14 4359.44,3145 v1(4400,3145)
  Bottom Layer w10: v1(1685,3955) 1687.5,3952.5 1687.5,3717.5 v1(1690,3715) 4440,3715 4465,3690 4465,3165 4445,3145 v1(4400,3145)
"T JTDI": IC1.17
"T JTDO": IC1.16
"T JTMS": IC1.27 R9.2 R15.2 S7.1 | length 5746.3
  Top Layer w10: R9.2 v1(1860,3295) ; v1(4330,3220) 4330,3182.5 ; IC1.27 4333.9,2983.29 4333.58,2983.6 4333.58,3121.42 4330,3125 4330,3182.5 ; R15.2 4775,3070 ; S7.1 5615,2690 4855,2690 4840,2705 4840,3055 4825,3070 4775,3070 ; 4330,3182.5 4762.5,3182.5 4775,3170 4775,3070
  Bottom Layer w10: v1(1860,3295) 3825,3295 3850,3320 3850,3590 3870,3610 4090,3610 4100,3600 4100,3270.86 4105.86,3265 4324.14,3265 4330,3259.14 v1(4330,3220)
"T SWDIO IN": IC1.25 R15.1 | length 689.6
  Top Layer w10: IC1.25@4375,2946.85 4375,2999.14 4380.86,3005 4695,3005 4705,2995 4705,2830 4720,2815 4760,2815 4775,2830 R15.1
"T SWO": IC1.31 R11.2 | length 4517
  Top Layer w10: R11.2 1955,2660 1985,2690 1985,3605 2010,3630 v1(2250,3630) ; IC1.31 4255.16,3040.65 4275,3060.49 v1(4275,3350)
  Bottom Layer w10: v1(2250,3630) 2305,3630 2360,3685 4245,3685 4275,3655 v1(4275,3350)
T_JRST: IC1.19
T_NRST: IC1.18 R10.2 | length 13487.2
  Top Layer w10: R10.2 1635,2985 1650,2970 v1(1650,2875) ; IC1.18 4430.16,2770.16 4430,2770 4565,2770 4575,2760 v1(4575,2720)
  Bottom Layer w10: v1(1650,2875) 1650,230 1740,140 6960,140 7010,190 7010,490 6965,535 4625,535 4575,585 v1(4575,2720)
U5V: J8.1
USB_DP: IC1.33 R26.2 | length 4985.2
  Top Layer w10: IC1.33 4215.79,3405.06 4229.86,3419.13 4299.13,3419.13 4319.13,3439.13 4319.13,4004.13 4335,4020 v1(4690,4020) ; v1(6115,4020) 6345,4020 6345.86,4020.86 6354.14,4020.86 6380,3995 6380,2810 6405,2785 R26.2
  Bottom Layer w10: 4705,4020 v1(6115,4020)
USB_RENUMn: IC1.38 R22.2 | length 6394.9
  Top Layer w10: v1(3955,2870) 3956.42,2868.58 IC1.38 ; v1(6860,480) R22.2@7092.71,480 ; R22.2 R22.2@7105,480
  Bottom Layer w10: v1(3955,2870) 3595,2870 3575,2850 3575,2465 3585,2455 4524.14,2455 4530,2449.14 4530,515 4565,480 v1(6580,480) v1(6860,480)
pads on no net: IC1.4 IC1.11 IC1.14 IC1.22 IC1.40 IC1.41 IC1.42 IC1.44 IC1.45 IC1.46 R27.1 S1.1 S2.1
copper on no net: | length 992.4
  Top Layer w9.96: 4130,2515 4155,2540 4155,2613.15
  Top Layer w10: 4045,2315 4045,2475 4070,2500 4115,2500 4130,2515 ; 4335,2613.15 4335,2300 4345,2290 4640,2290

## Other copper
Top Layer:
  rectangle net GND: 0,0 9040,5705

## Silkscreen, mask and mechanical layers (free items; w line width, h text height)
Mechanical 1:
  the board outline again, w10